# Altium PCB linkit-v4-0.2_6layers.PcbDoc (part 4 of 4)
Units mm, origin at the board's own origin, x right, y up, seen from the top; angles counter-clockwise.
Board outline 70 x 35 mm, 6 copper layers (Top Layer, Int1 (GND), Int2 (Sign), Int3 (Sign), Int4 (PWR), Bottom Layer), stack 1.551 mm thick; 193 components, 157 nets, 777 pads, 197 vias.
Unrouted connection lines stored in the file: 219.
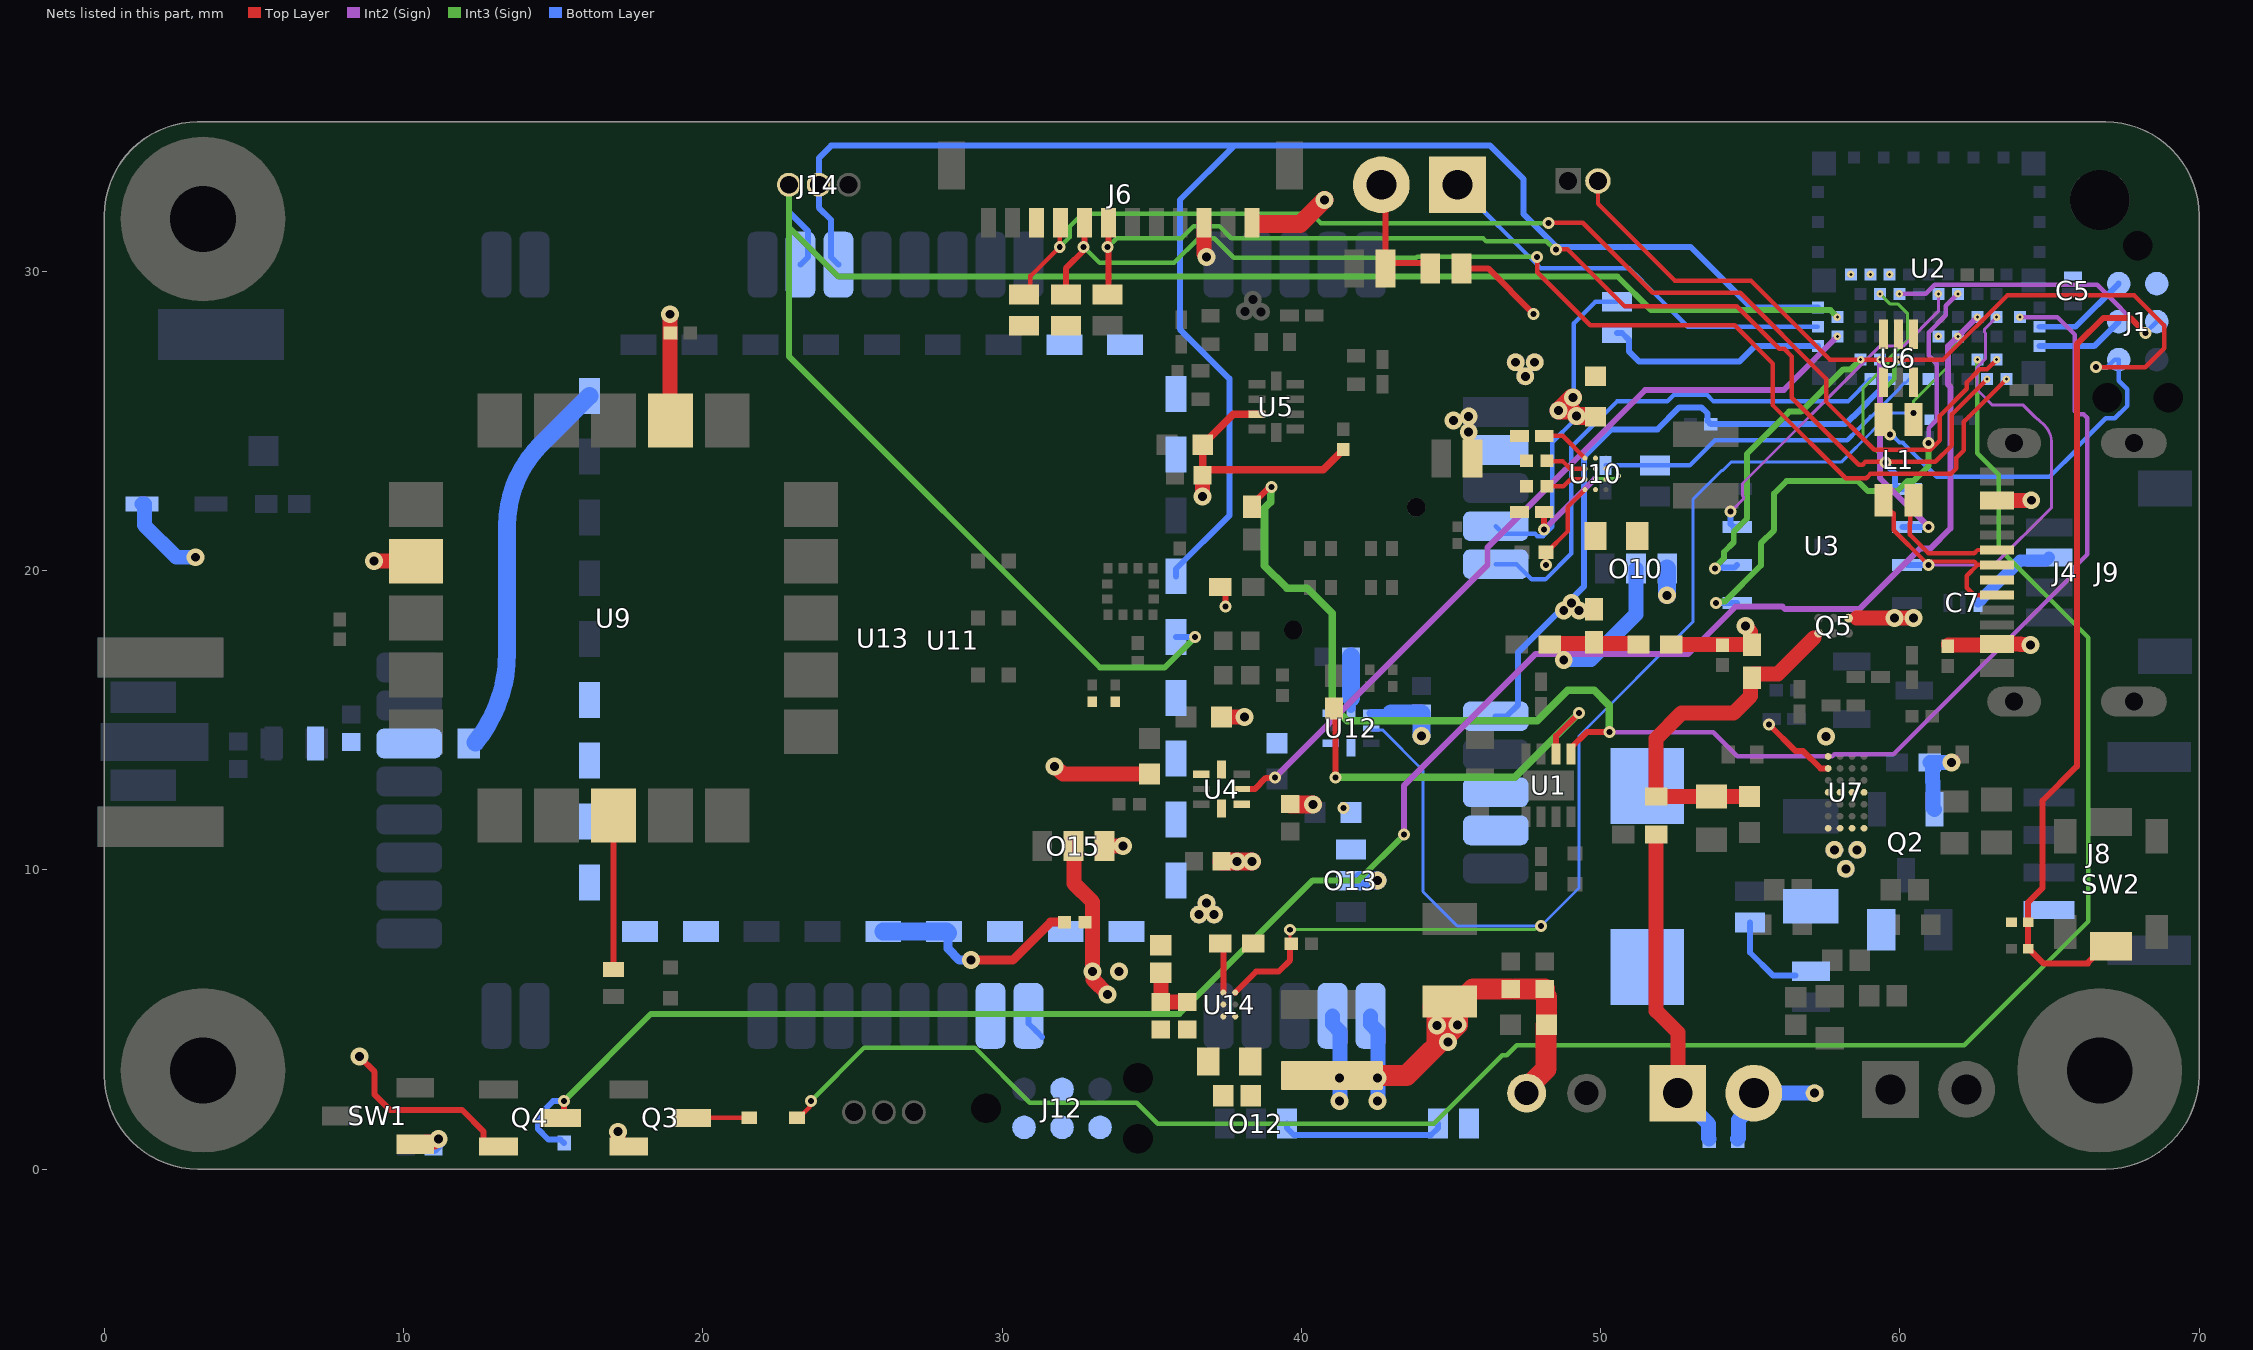
[diagram p7: the nets of this part, all layers, seen from the top]

## Via types
v1: diameter 0.6, hole 0.3, Top Layer to Int4 (PWR), 41 vias
v2: diameter 0.4, hole 0.2, Top Layer to Int3 (Sign), 38 vias
v3: diameter 0.25, hole 0.1, Int2 (Sign) to Bottom Layer, 24 vias
v4: diameter 0.25, hole 0.1, Int3 (Sign) to Bottom Layer, 15 vias
v5: diameter 0.4, hole 0.2, Int3 (Sign) to Bottom Layer, 12 vias
v6: diameter 0.5, hole 0.2, Top Layer to Bottom Layer, 12 vias
v7: diameter 0.4, hole 0.2, Top Layer to Int2 (Sign), 11 vias
v8: diameter 0.6, hole 0.3, Int4 (PWR) to Bottom Layer, 10 vias
v9: diameter 0.25, hole 0.1, Top Layer to Bottom Layer, 7 vias
v10: diameter 0.4, hole 0.2, Int2 (Sign) to Bottom Layer, 5 vias
v11: diameter 0.226, hole 0.1, Top Layer to Int3 (Sign), 5 vias
v12: diameter 0.4, hole 0.2, Int2 (Sign) to Int3 (Sign), 4 vias
v13: diameter 0.4, hole 0.2, Top Layer to Bottom Layer, 4 vias
v14: diameter 0.6, hole 0.3, Top Layer to Bottom Layer, 4 vias
v15: diameter 0.169, hole 0.1, Top Layer to Int3 (Sign), 2 vias
v16: diameter 0.6, hole 0.3, Top Layer to Int3 (Sign), 2 vias
v17: diameter 0.6, hole 0.3, Top Layer to Int2 (Sign), 1 vias

## Nets (pads, with @x,y where several pads share a name; then routed paths per layer and width w, separated by ;. In a path a pad name is that pad's centre, name@x,y a point inside that pad or via, vN(x,y) a via of type N, cw(c..) or ccw(c..) an arc to the next point about the centre after c; other vN are vias at no path point) (continued)
NetR45_1: R45.1 U10.B2 | length 3.8
  Top Layer w0.2: v7(48.112,21.375) R45.1@48.112,21.962
  Int2 (Sign) w0.2: v7(48.112,21.375) 49.794,23.057 v15(49.828,23.057)
  Int3 (Sign) w0.15: v15(49.828,23.057) 50.487,23.057 50.596,23.166 v15(50.601,23.166)
NetR46_1: R46.1 U10.C3 | length 3
  Top Layer w0.15: 48.112,24.502 48.733,24.502 49.478,23.757 ; R46.1@48.205,23.665 48.209,23.661 48.729,23.661 48.986,23.404 U10.C3@49.471,23.404
NetR47_2: R47.2 U10.D3
NetR50_1: R50.1 U14.C2 | length 1.7
  Top Layer w0.2: R50.1@37.296,7.535 37.392,7.439 U14.C2@37.392,5.903
NetR52_1: R52.1 R53.2 R55.1 | length 3
  Top Layer w0.254: R53.2@48.302,17.526 R53.2@48.344,17.569 ; R55.1@49.741,17.569 R55.1@49.784,17.611 R55.1@49.827,17.569 ; R52.1@51.224,17.569 R52.1@51.266,17.526
  Top Layer w0.5: R53.2@48.344,17.569 R55.1@49.741,17.569 ; R55.1@49.827,17.569 R52.1@51.224,17.569
NPG_LED: R15.2 U1.6 | length 13
  Top Layer w0.2: R15.2@41.09,15.394 41.137,15.347 v2(41.137,13.092) ; U1.6@48.51,13.877 48.51,14.474 v2(49.276,15.24)
  Int3 (Sign) w0.254: v2@41.159,13.092 47.128,13.092 v2(49.276,15.24)
nRESET: C6.2 J1.3 R16.1 SW2.2 U2.13 | length 36.5
  Top Layer w0.2: SW2.2@67.056,7.45 66.831,7.45 66.293,6.912 66.293,6.88 64.794,6.88 64.308,7.366 C6.2@64.288,7.366 R16.1@64.288,8.255 64.288,8.916 64.77,9.398 64.77,12.319 65.913,13.462 65.913,25.146 65.913,27.559 66.802,28.448 67.691,28.448 v13(68.199,27.94)
  Int2 (Sign) w0.15: v3(59.985,29.249) 60.861,29.249 61.161,29.549 66.59,29.549 v13(68.199,27.94)
  Bottom Layer w0.15: v13(68.199,27.94) J1.3@68.58,28.321
nRESET-SAT: J12.3 O11.2 R48.1 U2.42 U11.2@46.495,24.024 U13.35 | length 11.4
  Bottom Layer w0.1: 59.015,25.146 59.044,25.146 60.01,26.112 60.01,26.14 60.142,26.272 60.183,26.272 U2.42@60.31,26.399
  Bottom Layer w0.125: 58.602,24.719 59.015,25.131 59.015,25.146
  Bottom Layer w0.146: R48.1@50.175,23.516 O11.2@51.816,23.516 52.98,23.516 53.819,24.355 58.238,24.355 58.602,24.719
NRF_DBG: J1.6 J2.2 U2.43 | length 41.5
  Top Layer w0.146: J2.2@49.911,33.02 49.911,32.258 50.629,31.54 52.483,29.686 55.023,29.686 57.658,27.051 61.444,27.051 63.595,29.202 67.826,29.202 68.834,28.194 68.834,27.432 68.199,26.797 v13(66.548,26.797)
  Int3 (Sign) w0.146: v5(59.671,24.556) 59.309,24.918 59.309,25.899 59.813,26.404 59.813,26.823 59.833,26.842 59.833,26.897 v4(59.985,27.049)
  Bottom Layer w0.146: v5(59.671,24.556) 59.71,24.556 59.987,24.279 60.09,24.279 61.232,23.137 65.003,23.137 65.939,24.073 65.939,24.152 66.875,25.088 67.181,25.088 67.598,25.504 67.598,26.058 67.31,26.345 J1.6@67.31,27.051 67.182,27.051 66.928,26.797 v13(66.548,26.797)
PGND1: C41.2 C42.2 R45.2 R46.2 R47.1 U10.B1 U10.C1 V1.1 V2.1 V3.1
PGND2: C50.2 C51.2 C52.1 C53.1 C54.1 C55.1 R50.2 U14.A2 V4.1 V5.1 V6.1
PGND3: U7.A1 U7.A2 U7.A3 U7.A4 V8.1 V9.1 V10.1
POWER_CONTROL: D1.2 U2.35 | length 68.4
  Top Layer w0.15: D1.2@23.152,1.713 23.207,1.713 23.574,2.08 23.574,2.238 v7(23.622,2.286)
  Int3 (Sign) w0.15: v7(23.622,2.286) 25.4,4.064 29.083,4.064 30.923,2.224 34.503,2.224 35.202,1.524 44.422,1.524 46.708,3.81 46.863,3.81 47.196,4.143 62.154,4.143 66.288,8.277 66.288,17.765 63.305,20.748 63.305,23.202 62.585,23.922 v4(62.585,27.049)
QSPI_CLK: U2.45 U3.6 | length 7.1
  Int2 (Sign) w0.2: v3(59.335,27.049) 59.335,23.088 v10(60.96,21.463)
  Bottom Layer w0.2: U3.6@60.079,21.463 U3.6@60.244,21.463 v10(60.96,21.463)
QSPI_CS: U2.19 U3.1 | length 17.5
  Int2 (Sign) w0.15: v12(60.96,24.257) 60.96,24.765 61.233,25.038 61.233,25.146 61.233,26.91 60.96,27.183 60.96,27.958 61.535,28.533 61.535,28.849 v3(61.935,29.249)
  Int3 (Sign) w0.2: v10(53.848,18.923) 53.886,18.961 54.148,18.961 55.356,20.17 55.356,20.911 55.8,21.355 55.8,22.578 56.209,22.987 58.599,22.987 58.926,22.66 59.921,22.66 60.248,22.987 60.452,22.987 60.96,23.495 v12(60.96,24.257)
  Bottom Layer w0.2: v10(53.848,18.923) U3.1@54.564,18.923
QSPI_IO0: U2.11 U3.5 | length 8.5
  Int3 (Sign) w0.1: v4(59.335,29.249) 59.68,28.904 59.944,28.904 60.26,28.588 60.26,27.71 59.986,27.436 59.984,27.436 59.61,27.063 59.61,26.935 58.77,26.095 58.77,25.146 58.77,24.434 59.524,23.68 v5(59.524,23.614)
  Bottom Layer w0.2: v5(59.524,23.614) 59.524,23.56 59.844,23.24 59.844,22.833 59.944,22.733 U3.5@60.244,22.733
QSPI_IO1: U2.47 U3.2 | length 10.2
  Int3 (Sign) w0.2: v10(53.827,20.066) 53.827,20.12 54.12,20.414 54.12,20.621 54.448,20.949 54.448,21.298 54.892,21.742 54.892,23.904 56.134,25.146 56.302,25.314 56.698,25.314 58.108,26.724 58.36,26.724 v4(58.685,27.049)
  Bottom Layer w0.2: v10(53.827,20.066) 53.865,20.104 54.475,20.104 U3.2@54.564,20.193
QSPI_IO2: U2.17 U3.3 | length 11.3
  Int2 (Sign) w0.1: v10(54.338,21.971) 54.346,21.971 54.766,22.391 54.766,22.471 54.737,22.5 54.737,22.91 59.325,27.499 60.12,27.499 61.285,28.664 v3(61.285,29.249)
  Bottom Layer w0.2: v10(54.338,21.971) 54.338,21.563 54.438,21.463 U3.3@54.564,21.463
QSPI_IO3: U2.57 U3.7 | length 13.9
  Int2 (Sign) w0.1: v10(60.96,20.193) 63.155,20.193 65.072,22.11 65.072,24.302 ccw(c64.219,24.261) 64.823,24.865 ccw(c62.393,22.435) 64.505,25.146 64.124,25.527 63.098,25.527 62.575,26.049 62.575,26.792 62.86,27.076 62.86,27.938 62.821,27.977 62.821,28.06 v3(63.235,28.474)
  Bottom Layer w0.2: U3.7@60.244,20.193 v10(60.96,20.193)
REED_MCU: Q4.3 R7.2 U2.58 | length 66
  Top Layer w0.2: Q4.3@15.274,1.713 15.367,1.806 v13(15.367,2.286)
  Int2 (Sign) w0.2: v12(43.434,11.176) 43.434,12.827 47.819,17.212 52.92,17.212 54.512,18.803 56.075,18.803 56.154,18.724 58.654,18.724 60.677,20.747 61.027,20.747 61.687,21.407 61.687,25.146 61.687,26.136 61.61,26.213 61.61,27.499 v3(62.585,28.474)
  Int3 (Sign) w0.2: v13(15.367,2.286) 18.269,5.188 35.922,5.188 40.386,9.652 41.91,9.652 v12(43.434,11.176)
  Bottom Layer w0.2: R7.2@15.367,0.87 15.243,0.994 14.842,0.994 14.488,1.348 14.488,1.767 14.995,2.274 15.355,2.274 v13(15.367,2.286)
RX-OUT: C26.1 C27.1 Q5.C2 R35.2 R56.1 U7.D1 U7.D2 U7.D3 U7.D4 | length 12.3
  Top Layer w0.194: 57.132,17.758 Q5.C2@57.285,17.911
  Top Layer w0.5: C27.1@54.972,12.446 54.969,12.449 53.705,12.449 C26.1@53.702,12.452 53.699,12.449 51.861,12.449 R56.1@51.858,12.446 51.858,14.393 52.705,15.24 54.444,15.24 55.011,15.807 55.011,16.376 R35.2@55.061,16.426 55.061,16.501 55.111,16.551 55.925,16.551 57.132,17.758
SAFE: R26.2 U9.8 | length 5.1
  Top Layer w0.2: R26.2@17.018,6.673 U9.8@17.018,11.815
SAT_ANTENNA: C47.2 L3.2@7.065,14.224 L4.1 U11.31@10.195,14.224
SAT_EN: O12.3 O14.2 R20.2 U2.51 U12.2 U14.C1 | length 56.1
  Top Layer w0.1: R20.2@39.624,7.494 v2(39.624,8.001)
  Top Layer w0.2: U14.C1@37.792,5.903 38.493,6.604 39.243,6.604 39.624,6.985 R20.2@39.624,7.494
  Int3 (Sign) w0.1: v2(39.624,8.001) 47.798,8.001 47.925,8.128 v5(48.006,8.128) ; v5(60.452,25.273) 60.452,25.66 61.56,26.768 61.56,27.307 61.835,27.582 61.835,27.683 61.935,27.783 v4(61.935,27.824)
  Bottom Layer w0.1: U12.2@42.331,14.732 42.381,14.682 42.711,14.682 44.069,13.324 44.069,9.271 45.212,8.128 v5(48.006,8.128) 49.276,9.398 49.276,14.478 53.086,18.288 53.086,22.385 54.042,23.34 54.074,23.34 54.356,23.622 58.039,23.622 59.082,24.665 59.082,24.68 59.675,25.273 v5(60.452,25.273)
  Bottom Layer w0.2: O12.3@39.522,1.524 39.522,1.373 39.753,1.143 44.334,1.143 44.564,1.373 O14.2@44.564,1.524
SAT_INT: U2.46 U11.5@46.495,20.214 U13.1 | length 17.8
  Bottom Layer w0.146: U11.5@46.495,20.214 47.191,20.214 47.699,19.706 48.154,19.706 49.022,20.574 49.022,24.13 50.546,25.654 52.227,25.654 52.456,25.883 53.544,25.883 53.773,25.654 56.134,25.654 57.56,25.654 58.265,25.654 U2.46@59.01,26.399
SAT_SPI_MISO: O4.1 U11.17@29.615,5.124 U13.2
SAT_SPI_NSS: O1.1 U11.4@46.495,21.484 U13.24 | length 11
  Bottom Layer w0.146: U11.4@46.495,21.484 46.753,21.226 47.815,21.226 47.888,21.153 48.077,21.153 48.387,21.463 48.387,24.294 49.107,25.013 49.107,28.262 49.826,28.981 O1.1@50.546,28.981
SAT_SPI_SCK: O2.1 U11.16@30.885,5.124 U13.3 | length 0.9
  Bottom Layer w0.2: U11.16@30.885,5.124 30.885,4.87 31.139,4.616 U11.16@31.336,4.419
SAT_SWCLK: J12.4 U11.8@46.495,12.594 U13.25
SAT_SWDIO: J12.2 U11.9@46.495,11.324 U13.26
SAT_SWO: J12.6 U13.23
SAT_UART_RX: J14.2 U2.6 U11.38@24.535,30.224 U13.5 | length 56.9
  Bottom Layer w0.2: U11.38@24.535,30.224 24.283,30.476 24.283,31.724 23.876,32.131 J14.2@23.876,32.893 23.876,33.782 24.291,34.197 37.753,34.197 ; U13.5@35.814,19.812 35.814,20.062 37.592,21.84 37.592,26.416 35.941,28.067 35.941,32.385 37.753,34.197 ; U2.6@57.26,28.799 55.022,28.799 53.004,30.817 48.523,30.817 47.416,31.924 47.416,33.09 46.309,34.197 37.753,34.197
SAT_UART_TX: J14.3 U2.5 U11.37@23.265,30.224 U13.4 | length 64
  Int3 (Sign) w0.2: J14.3@22.876,32.893 22.876,31.48 ; v5(36.449,17.78) 35.433,16.764 33.274,16.764 22.876,27.162 22.876,31.48 ; v4(57.91,28.474) 57.682,28.702 51.689,28.702 50.565,29.826 24.53,29.826 22.876,31.48
  Bottom Layer w0.2: J14.3@22.876,32.893 22.876,31.988 23.519,31.345 23.519,30.478 U11.37@23.265,30.224 ; U13.4@35.814,17.78 v5(36.449,17.78)
SAT_WKUP: R19.2 U2.44 U11.6@46.495,15.134 U13.0 | length 22
  Bottom Layer w0.2: U11.6@46.495,15.134 46.855,15.134 47.244,15.523 47.244,17.272 49.449,19.477 49.449,23.813 50.351,24.716 51.893,24.716 52.633,25.456 53.367,25.456 53.574,25.249 53.574,24.998 R19.2@53.68,24.892 58.171,24.892 58.425,25.146 58.44,25.146 59.419,26.124 59.419,26.157 U2.44@59.66,26.399
SLOW_SWS_SEND: J10.1 U2.4 | length 14
  Bottom Layer w0.146: J10.1@45.212,32.893 48.006,30.099 50.963,30.099 51.309,29.753 51.5,29.561 52.913,28.149 U2.4@57.26,28.149
SMD_ANT: L4.2 U13.18 | length 12.8
  Bottom Layer w0.6: L4.2@12.405,14.258 ccw(c8.698,17.25) 13.462,17.25 13.462,21.501 cw(c17.303,21.499) 14.587,24.215 U13.18@16.214,25.842
SMD_RF_BUSY: U13.27
SMD_RF_NRST: U13.28
SMD_SCL: U13.33
SMD_SDA: U13.34
SMD_VPA_GOOD: U13.10
SPI_CLK: J6.8 O2.2 U2.32 | length 40.6
  Top Layer w0.15: v2(47.879,30.48) 47.879,29.972 49.651,28.2 54.477,28.2 55.759,26.918 55.759,25.521 58.189,23.091 58.876,23.091 59.016,23.231 61.7,23.231 61.885,23.416 61.885,23.765 62.135,24.015 62.135,24.974 62.307,25.146 v9(63.56,26.399)
  Top Layer w0.2: O2.2@32.131,29.223 32.131,30.101 32.754,30.724 J6.8@32.754,31.623
  Int3 (Sign) w0.15: v2(32.728,30.815) 33.257,30.286 35.746,30.286 36.569,31.109 37.091,31.109 37.74,30.459 43.848,30.459 43.868,30.48 v2(47.879,30.48)
SPI_MISO: J6.9 O4.2 U2.33 | length 40.8
  Top Layer w0.15: O4.2@30.734,29.223 30.949,29.438 30.949,29.845 30.958,29.845 v2(31.928,30.815) 31.928,31.597 J6.9@31.954,31.623 31.954,31.519 J6.9@31.779,31.344 ; v2(48.26,31.623) 49.403,31.623 51.742,29.284 54.663,29.284 57.531,26.416 57.531,25.654 59.146,24.039 61.016,24.039 61.327,24.35 61.327,25.169 62.23,26.072 62.23,26.289 62.665,26.724 62.91,26.724 v9(63.235,27.049)
  Int3 (Sign) w0.15: v2(31.928,30.815) 32.258,31.145 32.258,31.496 32.679,31.917 40.345,31.917 40.648,31.614 48.251,31.614 v2(48.26,31.623)
SPI_MOSI: J6.7 O3.2 U2.34 | length 38
  Top Layer w0.15: v2(48.514,30.734) 48.895,30.734 50.8,28.829 54.547,28.829 55.967,27.409 56.134,27.409 56.388,27.155 56.388,25.781 57.023,25.146 58.629,23.54 58.753,23.54 58.848,23.635 61.183,23.635 61.731,24.183 61.731,25.146 61.731,25.22 v9(62.91,26.399)
  Top Layer w0.2: O3.2@33.528,29.223 33.554,29.249 J6.7@33.554,31.623
  Int3 (Sign) w0.15: v2(33.528,30.815) 33.541,30.815 33.835,31.109 35.998,31.109 36.402,31.513 37.258,31.513 37.662,31.109 46.071,31.109 46.182,30.998 46.193,31.009 48.188,31.009 48.463,30.734 v2(48.514,30.734)
SPI_NSS: J6.10 O1.2 U2.2 | length 7.5
  Bottom Layer w0.2: O1.2@50.546,27.94 50.716,27.94 50.946,27.71 50.946,27.327 51.278,26.995 54.645,26.995 55.149,27.499 U2.2@57.26,27.499
SPV+: C56.1 J15.1 R54.1 | length 10.9
  Top Layer w0.5: R54.1@51.858,11.176 51.858,5.292 52.578,4.572 J15.1@52.578,2.54
  Bottom Layer w0.5: J15.1@52.578,2.54 53.602,1.516 53.602,1.041 C56.1@53.627,1.016
SPV-: C56.2 J15.2 V7.1 | length 3.8
  Bottom Layer w0.5: C56.2@54.577,1.016 54.602,1.041 54.602,1.645 55.118,2.161 J15.2@55.118,2.54 V7.1@57.15,2.54
STAT_LED: R13.2 U1.5 U2.27 | length 51.3
  Top Layer w0.2: R13.2@38.354,22.14 38.354,22.215 38.89,22.751 38.972,22.751 v2(39.01,22.789) ; U1.5@49.01,13.877 49.01,14.077 49.538,14.605 v2(50.292,14.605)
  Int2 (Sign) w0.15: v2(50.292,14.605) 53.761,14.605 54.569,13.798 57.746,13.798 57.808,13.859 59.778,13.859 65.849,19.93 65.849,20.129 66.259,20.539 66.259,25.106 66.219,25.146 66.146,25.219 65.962,25.219 65.849,25.332 65.849,27.877 65.252,28.474 v3(64.01,28.474)
  Int3 (Sign) w0.254: v2(39.01,22.789) 38.982,22.761 38.982,22.295 38.768,22.081 38.768,20.16 39.522,19.406 40.202,19.406 41.029,18.579 41.029,15.486 41.529,14.986 47.879,14.986 48.895,16.002 49.784,16.002 50.292,15.494 v2(50.292,14.605)
SWDCLK: J1.4 U2.30 | length 3
  Bottom Layer w0.2: U2.30@64.66,27.499 66.488,27.499 J1.4@67.31,28.321
SWDIO: J1.2 U2.28 | length 3.2
  Bottom Layer w0.2: U2.28@64.66,28.149 65.868,28.149 J1.2@67.31,29.591
SWS: C3.2 O6.2 U2.40 | length 3
  Top Layer w0.2: O6.2@45.352,30.099 46.241,30.099 47.752,28.588 v13(47.752,28.575)
SWS_IN: J10.2 O6.1 O8.1 | length 4.5
  Top Layer w0.2: J10.2@42.672,32.893 42.812,32.753 O8.1@42.812,30.099 ; O8.1@42.812,30.243 42.773,30.281 44.128,30.281 O6.1@44.31,30.099
USB_D_N: U2.10 U6.6
  other v9: 59.01,29.899
USB_D_P: U2.8 U6.4
  other v9: 58.36,29.899
USB_L_N: L1.3 U6.1
USB_L_P: L1.2 U6.3
USB_N: J4.A7 J4.B7 L1.4 | length 7.1
  Top Layer w0.146: L1.4@59.452,22.352 59.452,22.227 59.534,22.145 59.76,21.918 59.798,21.918 59.798,21.346 60.839,20.304 62.482,20.304 62.595,20.191 ; J4.B7@63.243,19.191 63.229,19.177 62.484,19.177 62.23,19.431 62.23,19.826 62.595,20.191 ; J4.A7@63.243,20.191 62.595,20.191
USB_P: J4.A6 J4.B6 L1.1 | length 4.4
  Top Layer w0.146: L1.1@60.452,22.352 60.344,22.244 60.344,21.592 60.335,21.582 60.335,21.195 60.952,20.578 62.482,20.578 62.595,20.691 J4.B6@63.243,20.691
VADC_EN: U2.3 U4.2 | length 26.5
  Top Layer w0.2: U4.2@38.013,12.7 U4.2@38.247,12.7 ; U4.2@38.247,12.701 38.444,12.701 38.817,13.073 39.108,13.073 v7(39.116,13.081)
  Int2 (Sign) w0.2: v7@39.129,13.094 46.228,20.193 46.228,20.775 51.488,26.035 56.121,26.035 v3(57.91,27.824)
VBAT: C1.1 C19.2 C20.1 C21.1 C22.1 C41.1 C50.1 C51.1 C52.2 J5.1 J6.3 L5.1 O9.1 Q2.2 Q3.2 R4.1 R9.1 R55.2 SW1.1 U10.A2 U14.A1 | length 19.1
  Top Layer w0.5: SW1.1@10.394,0.828 10.694,0.828 10.769,0.903 11.036,0.903 11.149,1.016 v14(11.176,1.016) ; v1(17.163,1.252) 17.164,1.251 17.164,0.813 17.214,0.763 Q3.2@17.526,0.763 ; J6.3@36.754,31.623 36.754,30.583 36.83,30.507 v1(36.83,30.48)
  Top Layer w0.7: L5.1@41.021,3.133 43.519,3.133 v1(45.212,4.826) 45.212,5.351 C19.2@44.958,5.605 ; C19.2@44.406,5.42 44.528,5.42 44.528,4.142 ; C19.2@45.333,5.605 45.742,6.014 C20.1@46.987,6.014 ; C20.1@47.145,6.017 C21.1@48.133,6.017 ; J5.1@47.53,2.54 47.53,2.702 48.182,3.354 48.182,4.82 C22.1@48.188,4.826 48.188,5.753 C21.1@48.163,5.778
  Bottom Layer w0.5: C1.1@11.001,0.762 11.001,0.772 11.157,0.928 11.157,0.997 v14(11.176,1.016) ; Q2.2@61.158,12.022 61.108,12.072 61.108,12.933 61.087,12.954 61.087,13.539 61.037,13.589 R4.1@61.002,13.589 v8(61.722,13.589)
  other v1: 44.899,4.253 44.528,4.8 48.768,18.669 49.276,18.669 49.022,18.923 45.593,24.638 45.085,25.019 45.593,25.146
VBAT_SENSE: O5.2 O7.1 R5.2 R6.1 | length 2.8
  Bottom Layer w0.2: O5.2@54.991,8.242 54.991,7.239 55.753,6.477 O7.1@56.515,6.477
VBUS: C17.2 C18.2 J4.A4_B9 J4.B4_A9 Q5.A1 R35.1 R52.2 U2.12 U6.5 U7.G4 | length 9.5
  Top Layer w0.254: C17.2@61.492,17.578 61.512,17.578 61.595,17.495 C17.2@61.595,17.475 C17.2@61.628,17.508 ; J4.A4_B9@63.21,17.508 J4.A4_B9@63.243,17.541 ; J4.B4_A9@63.222,22.32 J4.B4_A9@63.243,22.341
  Top Layer w0.5: R52.2@52.366,17.526 54.072,17.526 R35.1@55.061,17.526 55.011,17.576 55.011,17.956 54.845,18.122 v1(54.845,18.149) ; 58.547,18.411 59.813,18.411 v1(59.817,18.415) v1(60.452,18.415) ; C17.2@61.628,17.508 J4.A4_B9@63.21,17.508 ; J4.B4_A9@63.243,22.341 63.254,22.352 63.26,22.346 64.383,22.346 v1(64.389,22.352) ; J4.A4_B9@63.279,17.555 63.558,17.555 63.568,17.545 64.027,17.545 64.037,17.535 64.344,17.535 v1(64.364,17.516)
  Int3 (Sign) w0.5: v1@64.37,22.333 v1(64.389,22.352)
  other v1: 57.531,14.452
  other v3: 59.66,29.899
VCC_SEL: R9.2 U2.52 U10.B3 | length 1.4
  Top Layer w0.15: R9.2@48.205,22.819 48.759,22.819 48.999,23.058 U10.B3@49.461,23.058
  other v3: 61.285,27.824
VPA_EN: U12.7 U13.9
VSAT: C53.2 C54.2 C55.2 O10.2 O15.2 R49.1 U11.11@42.315,5.124 U11.12@41.045,5.124 U14.B2 | length 17.8
  Top Layer w0.5: O15.2@32.385,10.795 32.407,10.773 32.407,9.545 33.02,8.932 33.02,8.255 33.02,7.874 33.02,7.62 v1(33.02,6.604) 33.039,6.585 33.039,6.337 33.528,5.848 v1(33.528,5.842) ; C53.2@35.306,6.567 C55.2@35.306,5.582 C54.2@36.195,5.582
  Bottom Layer w0.5: U11.12@41.045,5.124 41.045,4.846 41.287,4.604 v8@41.287,3.048 ; v8(41.275,2.286) 41.287,2.298 v8@41.287,3.048 ; v8(41.275,3.048) v8@41.287,3.048 ; U11.11@42.315,5.124 42.315,4.846 42.557,4.604 v8@42.557,3.048 ; v8(42.545,2.286) 42.557,2.298 v8@42.557,3.048 ; v8(42.545,3.048) v8@42.557,3.048 ; v8(48.768,17.018) 48.787,17.037 49.676,17.037 51.181,18.542 O10.2@51.181,20.066
  other v1: 33.909,6.604
VSENS_1: C8.1 C12.2 C13.1 R28.1 U4.4 U5.8 | length 9.8
  Top Layer w0.2: C12.2@36.703,23.189 C12.2@36.705,23.191 ; R28.1@41.282,23.924 41.292,23.924 41.402,24.034 R28.1@41.402,24.044
  Top Layer w0.25: U5.8@38.521,25.228 37.726,25.228 C13.1@36.705,24.207 C12.2@36.705,23.191 36.705,23.193 36.88,23.368 40.726,23.368 R28.1@41.282,23.924
  Top Layer w0.5: v1(36.703,22.479) C12.2@36.703,23.189 ; C8.1@37.338,15.113 v1(38.1,15.113)
VSENS_2: C10.1 C39.1 D4.2 U4.5 U9.2 U9.17 | length 11.2
  Top Layer w0.5: v1(9.017,20.32) 10.413,20.32 U9.2@10.418,20.315 ; U9.17@18.898,25.035 v1@18.898,28.566 ; v1(31.75,13.462) 31.777,13.462 32.035,13.204 34.825,13.204 34.829,13.2 C10.1@34.925,13.2
  Bottom Layer w0.5: D4.2@1.263,22.225 1.342,22.225 1.342,21.518 2.413,20.447 v8(3.048,20.447)
  other v1: 18.899,28.566
VSYS: C5.1 C7.1 C9.2 C11.2 C42.1 C43.2 C46.2 J1.1 J6.1 J8.1 J9.2 O10.3 O13.2 O14.1 O15.3 Q4.2 R1.2 R2.2 R16.2 U4.1 U4.8 U10.C2 U10.D2 U12.1 U12.8 | length 22.5
  Top Layer w0.2: v14(8.529,3.759) 9.037,3.251 9.037,2.489 9.545,1.981 11.956,1.981 12.681,1.256 Q4.2@12.681,0.913 ; C9.2@39.624,12.2 C9.2@39.632,12.192
  Top Layer w0.3: Q4.2@12.681,0.913 12.831,0.763 Q4.2@13.174,0.763
  Top Layer w0.5: O15.3@33.426,10.795 v1(34.036,10.795)
  Top Layer w0.6: C11.2@37.338,10.287 v1(37.846,10.287) v1(38.354,10.287) ; J6.1@38.537,31.607 38.562,31.582 39.964,31.582 v1(40.767,32.385) ; C9.2@39.632,12.192 v1(40.386,12.192) ; v1(49.073,25.787) 49.041,25.787 v1(48.597,25.344) 49.027,25.344 v1(49.197,25.173) 49.201,25.17 49.803,25.17 C42.1@49.828,25.145
  Bottom Layer w0.1: O13.2@41.656,9.637 41.965,9.637 41.973,9.645 O13.2@41.98,9.652
  Bottom Layer w0.292: U12.1@42.331,15.232 42.989,15.232
  Bottom Layer w0.294: U12.8@41.656,15.382 41.656,15.741
  Bottom Layer w0.302: C7.1@62.603,18.923 62.603,18.973 C7.1@62.652,19.022
  Bottom Layer w0.4: C7.1@62.652,19.022 62.653,19.023 62.703,19.023 64.019,20.339 64.887,20.339 J9.2@64.987,20.439
  Bottom Layer w0.6: 41.656,15.741 C46.2@41.656,17.13 ; O13.2@41.973,9.645 v8(42.545,9.652) ; 42.989,15.232 C43.2@44.014,15.232 v8(44.014,14.478) ; v8(52.222,19.177) O10.3@52.222,20.066
VSYS_EN: D1.1 Q3.3 R8.2 U10.A3 | length 5
  Top Layer w0.15: Q3.3@19.626,1.713 D1.1@21.552,1.713 ; v7(48.175,20.193) R8.2@48.175,20.613 48.2,20.613 48.895,21.308 48.895,22.124 U10.A3@49.478,22.707
VSYS_SMD: C44.1 O13.3 R49.2 U12.4 U13.31 U13.32 | length 7.3
  Top Layer w0.3: v14(28.956,6.985) 30.353,6.985 31.623,8.255 R49.2@32.086,8.255
  Bottom Layer w0.3: U13.32@28.194,7.897 28.194,7.366 28.575,6.985 v14(28.956,6.985)
  Bottom Layer w0.6: U13.31@26.031,7.947 U13.32@28.063,7.947 28.144,7.947 U13.32@28.194,7.897
  other v5: 41.402,12.065
VSYS_VPA: C45.1 U12.5 U13.7 U13.8
WIRELESS_NCHG_LED: R14.1 U7.F4 | length 3.3
  Top Layer w0.2: R14.1@37.296,19.457 37.465,19.288 v2(37.465,18.796) ; v2(55.626,14.859) 56.515,13.97 56.769,13.97 57.347,13.392 U7.F4@57.601,13.392
pads on no net: J1.H1 J1.H2 J1.H3 J4.A8 J4.B8 J9.S1 J9.S2 J12.H1 J12.H2 J12.H3 J13.1 L3.1@7.1,14.224 L3.2@5.6,14.224 MEC1.1 MEC1.2 MH1.0 MH2.1 MH3.1 MH4.1 Q5.B1 Q5.B2 U2.15 U2.59 U2.65 U2.66 U2.67 U2.68 U2.69 U2.70 U2.71 U2.72 U2.73 U2.74 U2.75 U2.76 U2.77 U2.78 U8. U8.4 U8.11 U11.1@45.895,25.294 U11.2@45.895,24.024 U11.3@45.895,22.754 U11.4@45.895,21.484 U11.5@45.895,20.214 U11.6@45.895,15.134 U11.7@45.895,13.864 U11.8@45.895,12.594 U11.9@45.895,11.324 U11.10@45.895,10.054 U11.11@42.315,5.724 U11.12@41.045,5.724 U11.13@39.775,5.724 U11.14@38.505,5.724 U11.15@37.235,5.724 U11.16@30.884,5.724 U11.17@29.615,5.724 U11.18@28.345,5.724 U11.19@27.074,5.724 U11.20 U11.21@24.535,5.724 U11.22 U11.23 U11.24@14.375,5.724 U11.25 U11.26@10.795,7.874 U11.27 U11.28 U11.29@10.795,11.684 U11.30@10.795,12.954 U11.31@10.795,14.224 U11.32@10.795,15.494 U11.33@10.795,16.764 U11.34@13.105,29.624 U11.35@14.375,29.624 U11.36@21.995,29.624 U11.37@23.265,29.624 U11.38@24.535,29.624 U11.39@25.805,29.624 U11.40@27.075,29.624 U11.41@28.345,29.624 U11.42@29.615,29.624 U11.43@30.885,29.624 U11.44 U11.45@38.505,29.624 U11.46 U11.47@41.045,29.624 U11.48 U13.11 U13.12
copper on no net: | length 1.5
  Int2 (Sign) w0.1: 26.797,33.782 27.051,33.782
  Bottom Layer w0.2: 60.96,25.145 60.96,25.654 60.96,26.399
  other v3: 59.055,36.449
  other v4: 57.531,36.576
  other v5: 45.627,36.348

## Polygon pours and split planes (outlines as drawn)
AGND on Top Layer "AGND_L01_P003" (solid, pour order 3): 34.59,29.411 43.353,29.411 43.353,26.109 36.742,26.123 36.742,26.109 34.581,26.109
PGND2 on Top Layer "PGND2_L01_P002" (solid, pour order 2): 34.417,9.398 43.18,9.398 43.18,1.778 43.173,1.771 34.396,1.771
PGND1 on Top Layer "p" (solid, pour order 0): 46.399,21.248 48.304,21.248 49.447,20.105 54.991,20.105 54.991,27.344 46.399,27.344
GND on Int1 (GND) (split plane): 3.125,34.49 66.875,34.49 66.887,34.491 67.08,34.483 67.309,34.453 67.534,34.403 67.754,34.333 67.967,34.245 68.171,34.139 68.366,34.015 68.548,33.874 68.718,33.719 68.874,33.549 69.015,33.366 69.138,33.171 69.245,32.967 69.333,32.754 69.402,32.534 69.452,32.309 69.482,32.081 69.491,31.888 69.49,31.875 69.49,3.125 69.491,3.113 69.482,2.92 69.452,2.691 69.402,2.466 69.333,2.247 69.245,2.034 69.138,1.829 69.015,1.635 68.874,1.452 68.718,1.282 68.548,1.126 68.366,0.986 68.171,0.862 67.967,0.755 67.754,0.667 67.534,0.598 67.309,0.548 67.08,0.518 66.885,0.509 66.875,0.51 3.125,0.511 3.115,0.51 2.92,0.518 2.691,0.548 2.466,0.598 2.247,0.668 2.034,0.756 1.829,0.862 1.635,0.986 1.452,1.126 1.282,1.282 1.126,1.452 0.986,1.635 0.862,1.829 0.755,2.034 0.667,2.247 0.598,2.467 0.548,2.692 0.518,2.92 0.509,3.115 0.51,3.126 0.51,3.301 0.51,3.304 0.51,31.875 0.509,31.885 0.518,32.081 0.548,32.309 0.598,32.534 0.667,32.754 0.756,32.967 0.862,33.171 0.986,33.366 1.126,33.549 1.282,33.719 1.452,33.874 1.635,34.015 1.829,34.139 2.034,34.245 2.247,34.333 2.466,34.403 2.691,34.453 2.92,34.483 3.113,34.491
VBAT on Int4 (PWR) (split plane): 43.037,25.892 43.079,25.86 43.128,25.84 43.18,25.833 46.144,25.833 49.455,22.522 49.455,21.717 49.455,21.336 49.455,21.209 49.462,21.157 49.482,21.108 49.514,21.066 49.556,21.034 49.605,21.014 49.657,21.007 49.7,21.007 51.614,19.093 51.614,16.34 48.244,12.97 48.212,12.928 48.192,12.879 48.185,12.827 48.185,9.652 48.192,9.6 48.212,9.551 48.244,9.509 48.625,9.128 48.667,9.096 48.716,9.076 48.768,9.069 58.547,9.069 58.599,9.076 58.648,9.096 58.69,9.128 60.976,11.414 61.008,11.456 61.028,11.505 61.035,11.557 61.035,13.886 61.171,14.022 62.4,14.022 62.536,13.886 62.536,10.625 61.96,10.049 58.971,7.06 49.53,7.06 49.478,7.053 49.429,7.033 49.387,7.001 45.831,3.445 45.799,3.403 45.779,3.354 45.772,3.302 45.772,0.511 9.092,0.511 9.092,1.694 11.006,3.608 31.793,3.608 33.766,1.635 33.808,1.603 33.857,1.583 33.909,1.576 43.053,1.576 43.105,1.583 43.154,1.603 43.196,1.635 43.577,2.016 43.609,2.058 43.629,2.107 43.636,2.159 43.636,5.25 46.117,7.731 46.149,7.773 46.155,7.787 46.169,7.822 46.176,7.874 46.176,13.124 49.927,16.875 49.959,16.917 49.979,16.966 49.986,17.018 49.986,17.272 49.979,17.324 49.959,17.373 49.927,17.415 49.165,18.177 49.123,18.209 49.074,18.229 49.022,18.236 48.641,18.236 48.589,18.229 48.54,18.209 48.498,18.177 47.942,17.621 45.541,20.023 45.541,22.225 45.534,22.277 45.514,22.326 45.482,22.368 43.577,24.273 43.535,24.305 43.486,24.325 43.434,24.332 40.47,24.332 35.762,29.04 35.762,30.904 36.152,31.294 37.635,31.294
VSYS on Int4 (PWR) (split plane): 237 vertices, not listed, extent 0.509,0.509 69.491,34.491
VSENS_2 on Int4 (PWR) (split plane): 32.564,17.188 32.564,13.165 32.174,12.775 31.072,12.775 30.682,13.165 30.682,16.891 30.675,16.943 30.661,16.978 30.655,16.992 30.623,17.034 20.209,27.448 20.167,27.48 20.118,27.5 20.066,27.507 12.954,27.507 12.902,27.5 12.853,27.48 12.811,27.448 10.398,25.035 10.366,24.993 10.346,24.944 10.339,24.892 10.339,20.023 9.568,19.252 3.005,19.252 2.107,20.15 2.107,20.871 2.624,21.388 4.191,21.388 4.243,21.395 4.292,21.415 4.334,21.447 12.657,29.77 19.982,29.77
VSAT on Int4 (PWR) (split plane): 49.582,17.188 49.582,17.102 45.831,13.351 45.799,13.309 45.779,13.26 45.772,13.208 45.772,7.958 43.291,5.477 43.259,5.435 43.239,5.386 43.232,5.334 43.232,2.243 42.969,1.98 33.993,1.98 32.079,3.894 32.079,7.409 32.215,7.545 43.307,7.545 43.359,7.552 43.408,7.572 43.45,7.604 44.466,8.62 44.498,8.662 44.518,8.711 44.525,8.763 44.525,13.632 48.725,17.832 48.938,17.832
VSENS_1 on Int4 (PWR) (split plane): 38.279,21.633 38.279,18.86 38.279,16.037 38.286,15.985 38.306,15.936 38.338,15.894 38.787,15.445 38.787,14.468 38.364,14.045 38.057,14.045 36.016,16.086 36.016,22.776 36.152,22.912 37,22.912
VBUS on Int4 (PWR) (split plane): 65.33,22.649 65.33,17.61 64.559,16.839 60.579,16.839 60.527,16.832 60.478,16.812 60.436,16.78 57.917,14.261 57.018,14.261 54.431,16.848 54.431,18.839 54.694,19.102 60.071,19.102 60.123,19.109 60.172,19.129 60.214,19.161 63.838,22.785 65.194,22.785
LX2 on Int4 (PWR) (split plane): 53.773,23.57 49.859,23.57 49.859,25.706 53.773,25.706
LX1 on Int4 (PWR) (split plane): 53.777,23.146 53.773,23.114 53.773,21.411 49.868,21.411 49.859,21.42 49.859,21.717 49.859,22.606 49.859,23.166 53.775,23.166

## Other copper
Top Layer:
  rectangle net PGND1: 46.399,26.373 49.276,27.344
  rectangle net PGND1: 46.399,25.344 48.032,27.344
  region net COIL-2: 58.867,11.703 58.405,11.709 58.396,11.903 58.822,11.903 59.548,11.903 60.014,11.436 60.014,7.753 58.934,6.674 58.617,6.991 58.617,7.118 59.379,7.88 59.379,11.182 59.291,11.448 59.071,11.668
  region net VSAT: 35.052,6.858 34.29,6.858 34.036,7.112 32.512,7.112 32.385,6.985 32.385,5.461 32.639,5.207 34.163,5.207 34.29,5.334 34.29,5.969 34.417,5.969 34.671,6.223 35.179,6.223
  region net AGND: 38.956,28.582 38.875,27.372 38.868,27.379 38.4,27.379 38.4,27.418 37.525,28.292 36.773,28.292 36.702,28.364 36.702,28.983 37.13,29.411 39.785,29.411 40.187,29.813 40.839,29.813 40.839,29.154 40.7,29.016 40.681,29.035 38.956,29.016
  region net VSYS: 37.338,12.05 37.338,11.901 37.489,11.75 37.489,11.068 37.638,10.918 37.638,10.499 37.04,10.499 37.04,10.927 37.188,11.075 37.188,12.058
  region net VSYS: 38.013,12.2 38.138,12.075 38.598,12.075 38.772,11.901 39.693,11.901 39.693,12.279 39.474,12.498 38.754,12.498 38.581,12.325 38.208,12.325
  region net VSENS_1: 37.338,13.35 37.338,13.499 37.187,13.65 37.187,14.332 36.989,14.531 36.989,14.901 37.66,14.901 37.687,14.875 37.687,14.524 37.488,14.325 37.488,13.342
  region net VSENS_2: 36.663,13.2 36.538,13.325 36.078,13.325 35.854,13.549 34.983,13.549 34.983,13.121 35.254,12.85 35.87,12.85 36.095,13.075 36.468,13.075
  region net PGND2: 36.068,9.398 37.719,9.398 37.891,9.226 37.891,8.091 35.965,8.091 35.96,8.096
  region net VSAT: 37.392,5.503 37.392,5.604 37.12,5.604 36.845,5.879 36.109,5.879 36.109,5.403 36.228,5.283 36.995,5.283 37.104,5.403 37.132,5.403 37.396,5.403
  region net VBAT: 37.695,5.11 37.695,4.285 37.975,4.005 37.975,2.734 38.513,2.734 38.671,2.576 38.738,2.642 39.738,2.642 39.738,3.507 38.877,4.368 38.472,4.368 37.888,4.951 37.888,5.106
  region net NetL5_2: 37.792,5.503 37.792,5.402 38.121,5.402 38.508,5.015 39.692,5.015 39.692,5.993 39.69,5.994 38.501,5.994 38.112,5.605 37.791,5.605
  region net LX2: 50.178,23.836 50.685,24.344 51.353,24.344 51.53,24.167 51.528,23.855 51.165,23.678 50.398,23.678 50.178,23.678
  region net LX1: 50.177,22.632 50.59,22.219 51.352,22.219 51.528,22.395 51.527,22.707 51.279,22.828 50.434,22.828 50.397,22.791 50.177,22.791
  region net VSYS: 49.911,23.4 49.911,23.801 49.911,24.205 50.204,24.497 50.204,25.425 49.496,25.425 49.455,25.385 49.455,24.501 49.746,24.211 49.746,23.4
  region net VBAT: 49.747,22.71 49.745,22.707 49.745,22.258 49.454,21.967 49.454,21.039 50.162,21.039 50.202,21.08 50.202,21.963 49.912,22.254 49.912,22.705
  region net NetC2_2: 47.498,13.589 47.036,14.051 46.261,14.051 46.261,14.638 46.396,14.773 47.223,14.773 47.631,14.365 47.631,13.709
  region net NetC58_1: 45.974,11.288 45.976,11.289 46.377,11.289 47.203,12.115 47.575,12.115 47.575,11.262 47.198,10.885 46.095,10.885 45.904,11.076
  region net VBUS: 57.513,13.775 57.235,14.053 57.235,14.348 57.298,14.348 57.472,14.522 57.474,14.52 57.697,14.52 57.823,14.394 57.823,14.075 57.694,13.946 57.694,13.768
  region net VBUS: 58.557,18.661 58.312,18.661 58.166,18.506 58.142,18.393 58.144,18.393 58.241,18.268 58.453,18.167 58.537,18.163
  region net RX-OUT: 58.805,12.496 58.802,12.493 56.062,12.493 55.672,12.102 54.703,12.102 54.703,12.182 55.314,12.793 56.803,12.793 56.905,12.691 58.809,12.691 58.801,12.682 58.801,12.592
  region net NetC23_1: 57.514,11.702 57.988,11.702 58.001,11.896 57.58,11.896 56.854,11.896 56.388,11.43 56.388,7.747 57.468,6.667 57.785,6.985 57.785,7.112 57.023,7.874 57.023,11.176 57.111,11.442 57.331,11.662
  region net PGND3: 57.705,11.441 58.891,11.441 58.891,10.068 58.459,9.636 57.951,9.636 57.51,10.076 57.51,11.364
Int3 (Sign):
  region net GND: -0.381,15.113 11.815,15.118 12.449,23.087 13.03,26.795 17.119,26.8 17.115,25.125 16.006,23.82 15.133,22.484 15.095,18.22 14.824,14.708 13.589,12.954 12.954,12.319 -0.381,12.319
Bottom Layer:
  rectangle net SAT_ANTENNA: 7.1,13.972 12.18,14.572
  rectangle net NetC49_2: 3.152,14 5.635,14.595
  region net GND: 46.863,27.432 48.26,27.432 48.26,26.162 46.863,26.162
Int4 (PWR) (plane layer: these items are gaps in the copper):
  region: -0.381,15.113 11.815,15.118 12.449,23.087 13.03,26.795 17.119,26.8 17.115,25.125 16.006,23.82 15.133,22.484 15.095,18.22 14.824,14.708 13.589,12.954 12.954,12.319 -0.381,12.319
  lines w0.4: 8.89,0 8.89,1.778 10.922,3.81 31.877,3.81 ; 45.974,-0.064 45.974,3.302 49.53,6.858 59.055,6.858 62.103,9.906 62.738,10.541 62.738,13.97 62.484,14.224 61.087,14.224 60.833,13.97 60.833,11.557 58.547,9.271 50.8,9.271 48.768,9.271 48.387,9.652 48.387,12.827 51.816,16.256 51.816,19.177 49.657,21.336 49.657,21.717 49.657,22.606 46.228,26.035 43.18,26.035 37.719,31.496 36.068,31.496 35.56,30.988 35.56,28.956 40.386,24.13 43.434,24.13 45.339,22.225 45.339,19.939 47.879,17.399 ; 49.657,23.241 49.657,25.908 51.943,25.908 53.975,25.908 53.975,23.368 49.657,23.368 49.657,21.209 53.975,21.209 53.975,23.114 ; 53.975,23.177 53.975,25.781 ; 31.877,3.81 33.909,1.778 43.053,1.778 43.434,2.159 43.434,5.334 45.974,7.874 45.974,13.208 49.784,17.018 49.784,17.272 49.022,18.034 48.641,18.034 44.323,13.716 44.323,8.763 43.307,7.747 35.814,7.747 32.131,7.747 31.877,7.493 31.877,3.81 ; 1.905,20.066 2.921,19.05 9.652,19.05 10.541,19.939 10.541,24.892 12.954,27.305 17.907,27.305 20.066,27.305 30.48,16.891 30.48,13.081 30.988,12.573 32.258,12.573 32.766,13.081 32.766,17.272 20.066,29.972 12.573,29.972 4.191,21.59 2.794,21.59 2.54,21.59 1.905,20.955 1.905,20.066 ; 35.814,16.002 37.973,13.843 38.447,13.843 38.989,14.385 38.989,15.529 38.481,16.037 38.481,18.86 38.481,21.717 37.084,23.114 36.068,23.114 35.814,22.86 35.814,16.002 ; 54.229,16.764 54.229,18.923 54.61,19.304 60.071,19.304 63.754,22.987 65.278,22.987 65.532,22.733 65.532,17.526 64.643,16.637 60.579,16.637 58.001,14.059 56.934,14.059 54.229,16.764

## Silkscreen, mask and mechanical layers (free items; w line width, h text height)
Top Overlay:
  lines w0.15: 51.962,34.476 51.962,30.084 69.962,30.084 69.962,34.383
  lines w0.254: 4.58,5.91 29.58,5.91 29.58,30.91 4.58,30.91 4.58,5.91
Bottom Overlay:
  lines w0.15: 51.96,34.486 51.96,30.094 69.96,30.094 69.96,34.393
Mechanical 8:
  lines w0.254: 4.826,-0.762 40.326,-0.762 40.326,34.738 4.826,34.738 4.826,-0.762
Mechanical 12:
  lines w0.1: 0,3.301 0,3.126 ccw(c3.15,3.151) 3.125,0 66.875,0 ccw(c66.85,3.15) 70,3.125 70,6.425 70,31.875 ccw(c66.85,31.85) 66.875,35.001 ; 0,3.302 0,31.875 cw(c3.15,31.85) 3.125,35.001 ; 3.125,35 66.875,35

## Text inside footprints (layer, text, board x,y; h text height)
J13: Mechanical 10 "Edge of PCB" at -1.043,12.272 h0.8 r270
U11: Mechanical 3 "BOTTOM NO MAN'S LAND / SOLDER RESIST AREA / AVOID ROUTING ACTIVE LINES UNDER THIS AREA" at 44.894,24.824 h0.8